# EAGLE board CBI SMD (EAGLE 6.4)
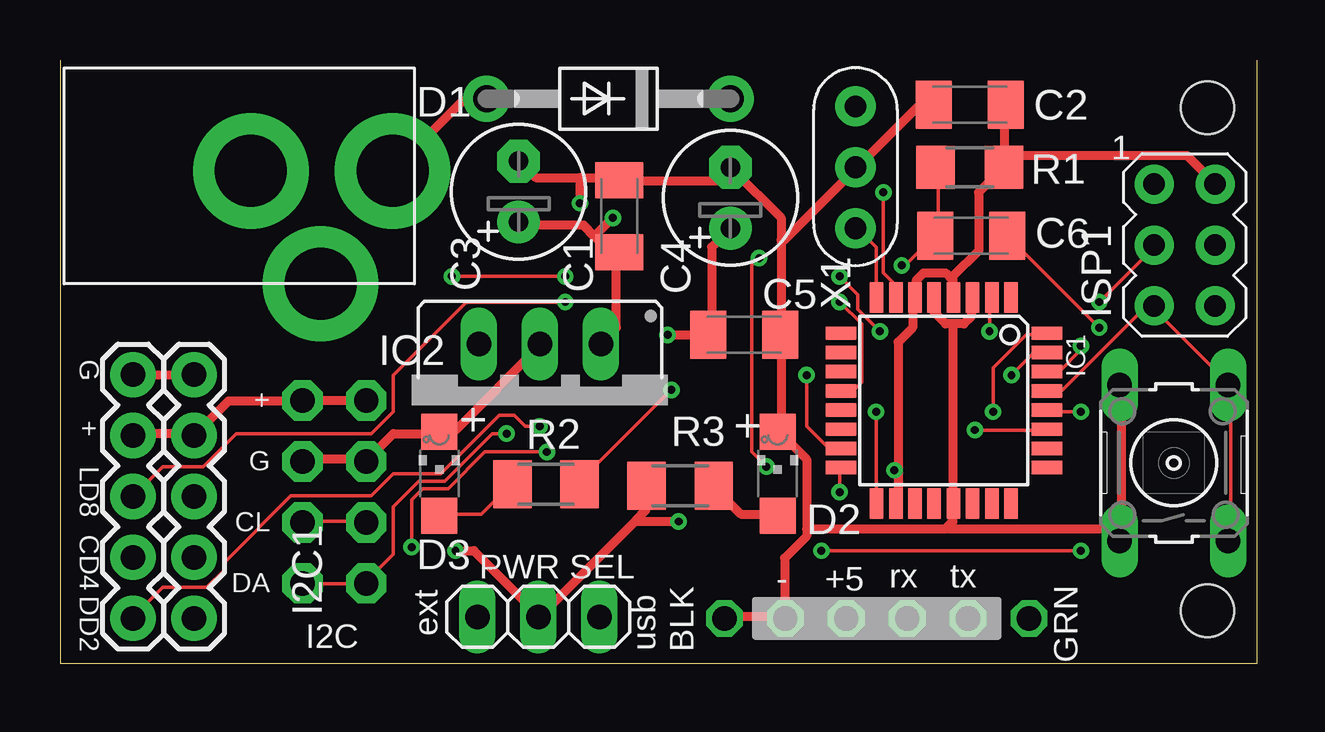
[diagram p0: board, top side]
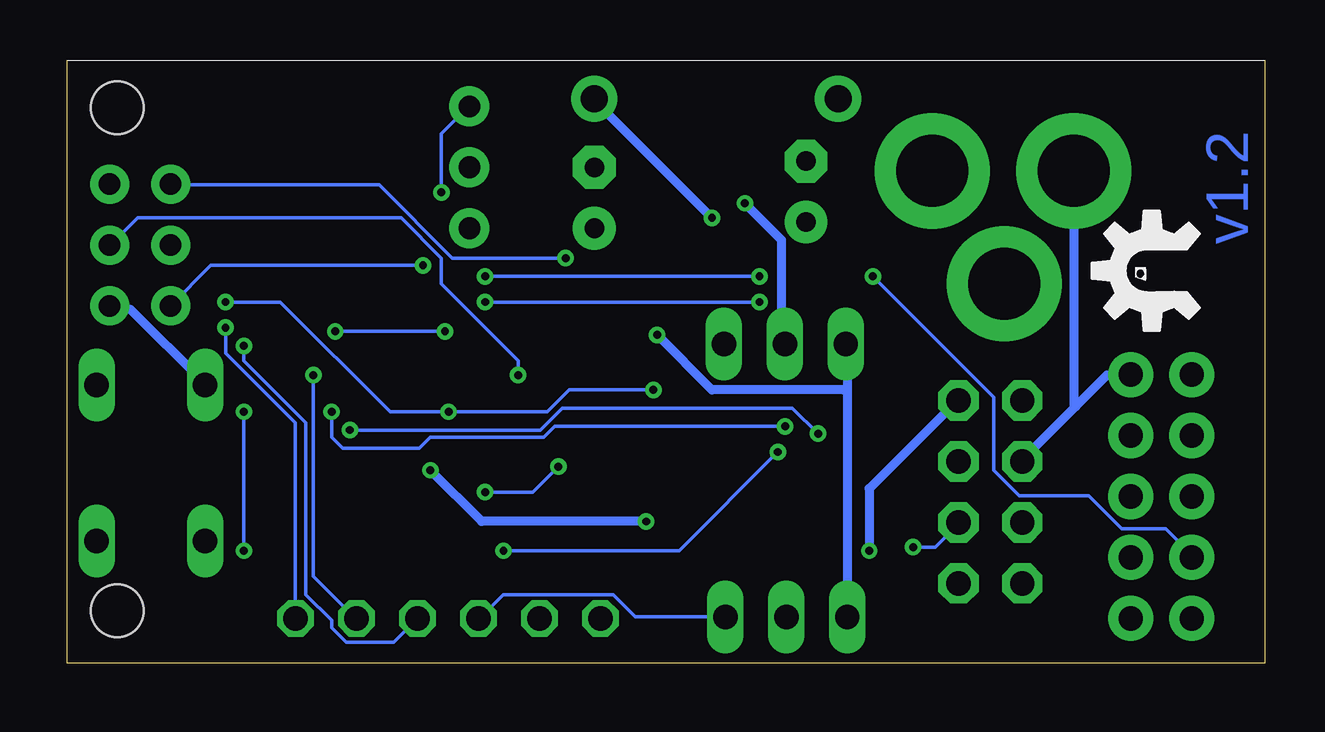
[diagram p1: board, bottom side, seen from below]

Size 49.89 x 25.13 mm. Coordinates in mm from the lower left corner, seen from the top.
Outline: 49.89,25.13 49.89,0 0,0 0,25.13
Copper layers (1*16): Top 0.0356mm / dielectric 1.5011mm / Bottom 0.0356mm
Design rules "LaenPCBOrder": minimum track width 6mil, minimum drill 13mil, track to track 6mil, track to pad 6mil, pad to pad 6mil, via to via 12mil, smd to smd 6mil, copper to edge 15mil, drill to drill 6mil, minimum pad ring 7mil, minimum via ring 7mil, stop-mask expansion 4mil, vias tented up to drill 0mil, thermal gap 10mil
Net classes: 1 supply: width 0.381 mm, drill 0.152 mm, clearance 0.152 mm
Holes 2.2 mm at 47.81,2.18 47.81,23.14

## Footprints (pad centres in the part's own frame; a part is rotated, then mirrored left to right if it is on the bottom)
C1206K = smd 1.5 x 2: 1 -1.5,0; 2 1.5,0
E2,5-6 = drill 0.813 pad 1.778: + -1.27,0 | drill 0.813 pad 1.778 octagon: - 1.27,0
DO41-10 = drill 1.118 pad 1.93: A 5.08,0; C -5.08,0
CHIPLED_1206 = smd 1.5 x 1.5: A 0,-1.75; C 0,1.75
1X04-CB = drill 1.016 pad 1.676 octagon: 1 -3.81,0; 2 -1.27,0; 3 1.27,0; 4 3.81,0
TQFP32-08 = smd 1.27 x 0.559: 1 -4.293,2.8; 2 -4.293,2; 3 -4.293,1.2; 4 -4.293,0.4; 5 -4.293,-0.4; 6 -4.293,-1.2; 7 -4.293,-2; 8 -4.293,-2.8; 17 4.293,-2.8; 18 4.293,-2; 19 4.293,-1.2; 20 4.293,-0.4; 21 4.293,0.4; 22 4.293,1.2; 23 4.293,2; 24 4.293,2.8 | smd 0.559 x 1.27: 9 -2.8,-4.293; 10 -2,-4.293; 11 -1.2,-4.293; 12 -0.4,-4.293; 13 0.4,-4.293; 14 1.2,-4.293; 15 2,-4.293; 16 2.8,-4.293; 25 2.8,4.293; 26 2,4.293; 27 1.2,4.293; 28 0.4,4.293; 29 -0.4,4.293; 30 -1.2,4.293; 31 -2,4.293; 32 -2.8,4.293
78XXS = drill 1.016 long: GND 0,-2.54; IN -2.54,-2.54; OUT 2.54,-2.54
AVRISP = drill 0.9 pad 1.626: 1 -1.27,2.54; 2 1.27,2.54; 3 -1.27,0; 4 1.27,0; 5 -1.27,-2.54; 6 1.27,-2.54
PJ-102A = drill 3 pad 4.8: RING 0.1,-3.39; RING_SW -4.6,-6.29; TIP 0.1,-9.29
1X06-CLEAN = drill 1.016 octagon: 1 -6.35,0; 2 -3.81,0; 3 -1.27,0; 4 1.27,0; 5 3.81,0; 6 6.35,0
1X03 = drill 1.016 long: 1 -2.54,0; 2 0,0; 3 2.54,0
R1206 = smd 1.6 x 1.803: 1 -1.422,0; 2 1.422,0
M1206 = smd 1.6 x 2: 1 -1.4,0; 2 1.4,0
B3F-10XX = drill 1.016 long: 1 -3.251,2.261; 2 3.251,2.261; 3 -3.251,-2.261; 4 3.251,-2.261
1X05 = drill 1.016 pad 1.88: 1 0,0; 2 2.54,0; 3 5.08,0; 4 7.62,0; 5 10.16,0
CERM_OSC = drill 0.9 pad 1.676: P$1 -2.54,0; P$2 0,0; P$3 2.54,0

## Placement (x,y rotation side)
C1  0.1uF  [C1206K]  23.3,18.63 90 top
C2  0.1uF  [C1206K]  37.9,23.27 180 top
C3  10uF/25V  [E2,5-6]  19.11,19.65 90 top
C4  100/6VuF  [E2,5-6]  27.93,19.39 90 top
C5  0.1uF  [C1206K]  28.51,13.68 0 top
C6  0.1uF  [C1206K]  37.97,17.81 180 top
D1  1N4001  [DO41-10]  22.85,23.52 180 top
D2  [CHIPLED_1206]  29.9,7.9 0 top
D3  Green  [CHIPLED_1206]  15.81,7.9 0 top
I2C  [1X04-CB]  10.1,7.14 90 top
I2C1  [1X04-CB]  12.76,7.14 90 top
IC1  MEGA48/88/168-AU  [TQFP32-08]  36.83,10.95 270 top
IC2  [78XXS]  20,10.76 180 top
ISP1  AVRISP-6  [AVRISP]  46.86,17.42 0 top
J1  2.1MMJACK  [PJ-102A]  4.57,20.41 90 top
JP7  [1X06-CLEAN]  34.03,1.87 0 top
PWR_SEL  [1X03]  19.93,1.93 0 top
R1  10K  [R1206]  37.9,20.66 180 top
R2  1.0 K  [M1206]  25.84,7.39 0 top
R3  1.0 K  [M1206]  20.25,7.46 180 top
S1  RESET  [B3F-10XX]  46.41,8.34 90 top
TEECES  [1X05]  3.04,1.87 90 top
TEECES1  [1X05]  5.58,1.87 90 top
U$2  RSERIES-OSHW-LOGOMEDIUM  [RSERIES-OSHW-LOGO-MEDIUM]  4.76,16.25 90 bottom
X1  16.00MHz  [CERM_OSC]  33.14,20.66 270 top

## Library data of the parts
C1-C6 D1-D3 J1 R2 R3 = minimidi
I2C I2C1 JP7 = carduino
IC1 = avr-7
IC2 = v-reg
ISP1 = adafruit
PWR_SEL = pinhead
R1 = rcl-ez
S1 = switch-omron
TEECES TEECES1 = SparkFun-Connectors
U$2 = rseries
X1 = digg

## Nets
+5V [supply]: C2.1 I2C1.4 I2C.4 IC1.4 IC1.6 IC1.18 ISP1.2 PWR_SEL.2 R1.1 R2.1 TEECES1.4 TEECES.4
+9V [supply]: C1.1 C3.+ D1.C IC2.IN
ANALOG0: IC1.23
ANALOG1: IC1.24
ANALOG2: IC1.25
ANALOG3: IC1.26
ANALOG4: I2C1.1 I2C.1 IC1.27
ANALOG5: I2C1.2 I2C.2 IC1.28
AREF: IC1.20
DIGITAL2: IC1.32 TEECES.1
DIGITAL3: IC1.1
DIGITAL4: IC1.2 TEECES.2
DIGITAL5: IC1.9
DIGITAL6: IC1.10
DIGITAL7: IC1.11
DIGITAL8: IC1.12 TEECES.3
DIGITAL9: IC1.13
DIGITAL10: IC1.14
GND [supply]: C1.2 C2.2 C3.- C4.- C5.2 D2.C D3.C I2C1.3 I2C.3 IC1.3 IC1.5 IC1.21 IC2.GND ISP1.6 J1.RING JP7.1 JP7.2 S1.1 S1.2 TEECES1.5 TEECES.5 X1.P$2
MISO: IC1.16 ISP1.1
MOSI: IC1.15 ISP1.4
N$1: IC1.7 X1.P$1
N$2: IC1.8 X1.P$3
N$3 [supply]: D2.A R2.2
N$4: D3.A R3.2
N$17 [supply]: D1.A J1.TIP
N$22 [supply]: C4.+ C5.1 IC2.OUT PWR_SEL.1
RST: C6.2 IC1.29 ISP1.5 R1.2 S1.3 S1.4
RTS#: C6.1 JP7.6
RXD: IC1.30 JP7.4
SCK: IC1.17 ISP1.3 R3.1
TXD: IC1.31 JP7.5
USB_5V: JP7.3 PWR_SEL.3

## Tracks (layer width: path | path; a pad name or v marks a point on that pad's centre or on a via)
+5V  (via drill 0.33)
  Top 0.381: 34.92,8.04 34.92,13.37 35.53,13.98 35.53,15.2 IC1.6 35.68,15.35 35.68,15.96 35.99,16.27 36.9,16.27 37.21,15.96 | 34.92,8.04 34.92,6.67 IC1.18 | 37.21,15.96 37.21,15.35 IC1.4 | R1.1 39.34,20.69 39.34,23.13 C2.1 | R1.1 39.49,21.15 46.96,21.15 48.03,20.08 ISP1.2 | 37.21,15.96 37.21,16.12 38.27,17.18 38.27,19.62 39.19,20.54 R1.1 | 24.02,5.98 19.98,1.94 PWR_SEL.2 19.83,2.1 17.24,4.69 v16.48,4.69 | 24.02,5.98 24.4,6.36 24.4,7.28 R2.1 | I2C1.4 12.67,10.94 10.23,10.94 I2C.4 9.93,10.94 7.03,10.94 5.66,9.56 TEECES1.4 5.51,9.56 3.07,9.56 TEECES.4 | v25.78,5.91 24.1,5.91 24.02,5.98 | v34.77,8.04 34.92,8.04
  Bottom 0.381: v16.48,4.69 16.48,7.28 12.82,10.94 I2C1.4 | v34.77,8.04 32.63,5.91 v25.78,5.91
+9V  (via drill 0.33)
  Top 0.381: IC2.IN 22.58,13.37 23.18,13.98 23.18,17.03 C1.1 23.03,17.03 22.27,17.79 | 22.27,17.79 21.81,18.25 19.22,18.25 C3.+ | 22.27,17.79 v23.03,18.55
  Bottom 0.381: v23.03,18.55 27.91,23.43 D1.C
ANALOG4  (via drill 0.33)
  Top 0.152: v38.12,9.72 41.02,9.72 IC1.27 | v18.61,9.56 18,9.56 16.02,7.58 14.96,7.58 13.89,6.51 13.89,4.53 12.82,3.47 I2C1.1 12.67,3.32 10.23,3.32 I2C.1
  Bottom 0.152: v38.12,9.72 30.2,9.72 29.28,10.63 19.68,10.63 v18.61,9.56
ANALOG5  (via drill 0.33)
  Top 0.152: v42.54,10.48 41.17,10.48 IC1.28 | v31.72,4.69 v42.54,4.69 | v20.29,8.8 17.7,8.8 16.17,7.28 15.11,7.28 14.65,6.82 v14.65,4.84 | I2C.2 10.23,5.91 12.67,5.91 I2C1.2
  Bottom 0.152: v42.54,4.69 v42.54,10.48 | v31.72,4.69 24.4,4.69 v20.29,8.8 | v14.65,4.84 13.74,4.84 12.82,5.75 I2C1.2
DIGITAL2  (via drill 0.33)
  Top 0.152: v38.88,10.48 38.88,12.31 40.25,13.68 41.02,13.68 IC1.32 | v19.98,9.87 19.38,9.87 18.92,10.32 18.31,10.32 15.87,7.89 13.89,7.89 12.97,6.97 9.62,6.97 6.88,4.23 6.88,3.92 6.12,3.16 4.29,3.16 3.07,1.94 TEECES.1
  Bottom 0.152: v38.88,10.48 38.88,9.41 38.43,8.95 35.23,8.95 34.77,9.41 30.04,9.41 29.59,9.87 v19.98,9.87
DIGITAL4  (via drill 0.33)
  Top 0.152: v38.73,13.83 38.73,15.2 IC1.2 | v34.16,13.83 33.24,14.74 33.24,15.35 v32.48,16.12 | v16.33,16.12 v21.05,16.12
  Bottom 0.152: v34.16,13.83 v38.73,13.83 | v21.05,16.12 v32.48,16.12 | v16.33,16.12 11.3,11.09 11.3,8.04 10.23,6.97 7.34,6.97 5.96,5.6 4.14,5.6 3.07,4.53 TEECES.2
DIGITAL8  (via drill 0.33)
  Top 0.152: v32.48,15.05 33.4,14.13 33.4,11.7 33.09,11.39 32.63,11.39 IC1.12 | v21.05,15.05 16.94,15.05 13.89,12 13.89,10.48 12.97,9.56 7.34,9.56 5.96,8.19 4.29,8.19 3.07,6.97 TEECES.3
  Bottom 0.152: v21.05,15.05 v32.48,15.05
GND  (via drill 0.33)
  Top 0.381: TEECES.5 3.07,12 5.51,12 TEECES1.5 | IC2.GND 19.98,13.22 16.48,9.72 15.87,9.72 D3.C 15.72,9.56 13.89,9.56 12.82,8.5 I2C1.3 12.67,8.5 10.23,8.5 I2C.3 | S1.2 44.22,11.54 44.22,5.14 S1.1 44.06,5.6 37.05,5.6 36.98,5.68 | IC1.5 36.44,15.2 IC1.5 | 37.21,14.13 37.66,14.13 37.97,14.44 37.97,15.2 IC1.3 | 37.21,14.13 36.9,14.13 36.44,14.59 36.44,15.05 IC1.5 | 37.21,14.13 37.21,13.98 37.21,6.67 IC1.21 37.21,6.51 37.21,5.91 36.98,5.68 | IC1.3 38.12,15.2 IC1.3 | C2.2 36.29,23.13 35.68,23.13 33.24,20.69 X1.P$2 33.09,20.54 30.2,17.64 30.04,17.64 | 21.66,20.23 19.83,20.23 19.22,20.84 C3.- | 21.66,20.23 23.18,20.23 C1.2 23.49,20.08 28.37,20.08 C4.- 28.06,20.54 30.04,18.55 30.04,17.64 | JP7.1 27.76,1.94 30.2,1.94 JP7.2 30.2,2.1 30.2,4.38 31.11,5.3 31.11,5.6 | 30.04,17.64 30.04,13.83 C5.2 30.04,13.68 30.04,9.72 D2.C 30.04,9.56 31.11,8.5 31.11,5.6 | 36.98,5.68 36.9,5.6 31.26,5.6 31.11,5.6 | v21.66,19.16 21.66,20.08 21.66,20.23 | 48.18,14.9 ISP1.6 48.18,14.9
  Bottom 0.381: 7.87,10.71 10.08,8.5 I2C.3 | 7.87,10.71 6.57,12 5.66,12 TEECES1.5 | J1.RING 7.95,20.38 7.95,10.78 7.87,10.71 | ISP1.6 48.03,14.74 47.26,14.74 44.22,11.7 S1.2 | v21.66,19.16 20.14,17.64 20.14,13.37 IC2.GND
MISO  (via drill 0.33)
  Top 0.152: v32.48,7.12 32.48,8.04 IC1.16 | v29.43,8.19 28.82,8.8 28.82,16.57 v29.13,16.88
  Bottom 0.152: v32.48,7.12 30.5,7.12 v29.43,8.19 | v29.13,16.88 33.85,16.88 36.9,19.93 45.59,19.93 ISP1.1
MOSI  (via drill 0.33)
  Top 0.152: v31.11,12 31.11,9.87 32.02,8.95 32.48,8.95 IC1.15
  Bottom 0.152: v31.11,12 31.11,12.61 34.31,15.81 34.31,16.88 35.99,18.55 46.96,18.55 48.03,17.49 ISP1.4
N$1  (via drill 0.33)
  Top 0.152: v34.31,19.62 34.31,16.27 34.77,15.81 34.77,15.35 IC1.7
  Bottom 0.152: v34.31,19.62 34.31,22.06 33.24,23.13 X1.P$1
N$2
  Top 0.152: IC1.8 34.01,15.35 34.01,17.34 33.24,18.1 X1.P$3
N$3
  Top 0.381: D2.A 29.89,6.21 28.37,6.21 27.3,7.28 R2.2
N$4
  Top 0.152: D3.A 15.87,6.21 17.55,6.21 18.77,7.43 R3.2
N$17
  Top 0.381: D1.A 17.7,23.43 16.78,23.43 13.89,20.54 J1.TIP
N$22  (via drill 0.33)
  Top 0.381: C4.+ 27.91,18.1 27.15,17.34 27.15,13.68 C5.1 26.84,13.68 v25.32,13.68
  Bottom 0.381: 17.39,11.39 17.39,13.22 IC2.OUT | 17.39,11.39 17.39,1.94 PWR_SEL.1 | v25.32,13.68 23.03,11.39 17.55,11.39 17.39,11.39
RST  (via drill 0.33)
  Top 0.152: S1.3 48.79,5.14 48.79,11.54 S1.4 48.64,11.7 45.59,14.74 | R1.2 36.6,20.54 36.6,17.95 C6.2 36.44,17.79 35.23,16.57 v35.07,16.57 | 45.59,14.74 45.13,14.74 41.78,11.39 41.17,11.39 IC1.29 | 45.59,14.74 ISP1.5 45.59,14.74
  Bottom 0.152: v35.07,16.57 43.91,16.57 45.59,14.9 ISP1.5
RTS#  (via drill 0.33)
  Top 0.152: v43.3,13.98 39.49,17.79 C6.1
  Bottom 0.152: v43.3,13.98 43.3,12.92 40.41,10.02 40.41,1.94 JP7.6
RXD  (via drill 0.33)
  Top 0.152: v42.54,13.22 42.54,13.07 41.63,12.15 41.17,12.15 IC1.30
  Bottom 0.152: v42.54,13.22 42.54,12.61 39.95,10.02 39.95,2.86 38.88,1.79 38.88,1.49 38.27,0.88 36.29,0.88 35.38,1.79 JP7.4
SCK  (via drill 0.33)
  Top 0.152: v34.01,10.48 34.01,6.67 IC1.17 | v25.47,11.39 21.66,7.58 R3.1 | v43.3,15.05 45.59,17.34 ISP1.3
  Bottom 0.152: v25.47,11.39 28.98,11.39 29.89,10.48 v34.01,10.48 36.44,10.48 41.02,15.05 v43.3,15.05
TXD  (via drill 0.33)
  Top 0.152: v39.64,12 40.56,12.92 41.02,12.92 IC1.31
  Bottom 0.152: v39.64,12 39.64,3.62 37.97,1.94 JP7.5
USB_5V
  Bottom 0.152: PWR_SEL.3 22.58,1.94 26.23,1.94 27.15,2.86 31.72,2.86 32.63,1.94 JP7.3

## Text on the board
Bottom: v1.2
tPlace: D1 | C3 | C4 | C5 | C1 | X1 | IC2 | + | R2 | R3 | + | D2 | D3 | PWR SEL | ext | BLK | - | +5 | rx | tx | GRN | usb
_tsilk: C2 | R1 | C6 | G | + | + | G | LD8 | CL | CD4 | DA | DD2